# Altium PCB PC110.PcbDoc (part 17 of 24)
Units mm, origin at the board's own origin, x right, y up, seen from the top; angles counter-clockwise.
Board outline 150.05 x 107.35 mm, 10 copper layers (In2.Cu, F.Cu, B.Cu, In1.Cu, In3.Cu, In4.Cu, In5.Cu, In6.Cu, In7.Cu, In8.Cu); 936 components, 1434 nets, 4891 pads, 6088 vias.
Unrouted connection lines stored in the file: 2995.
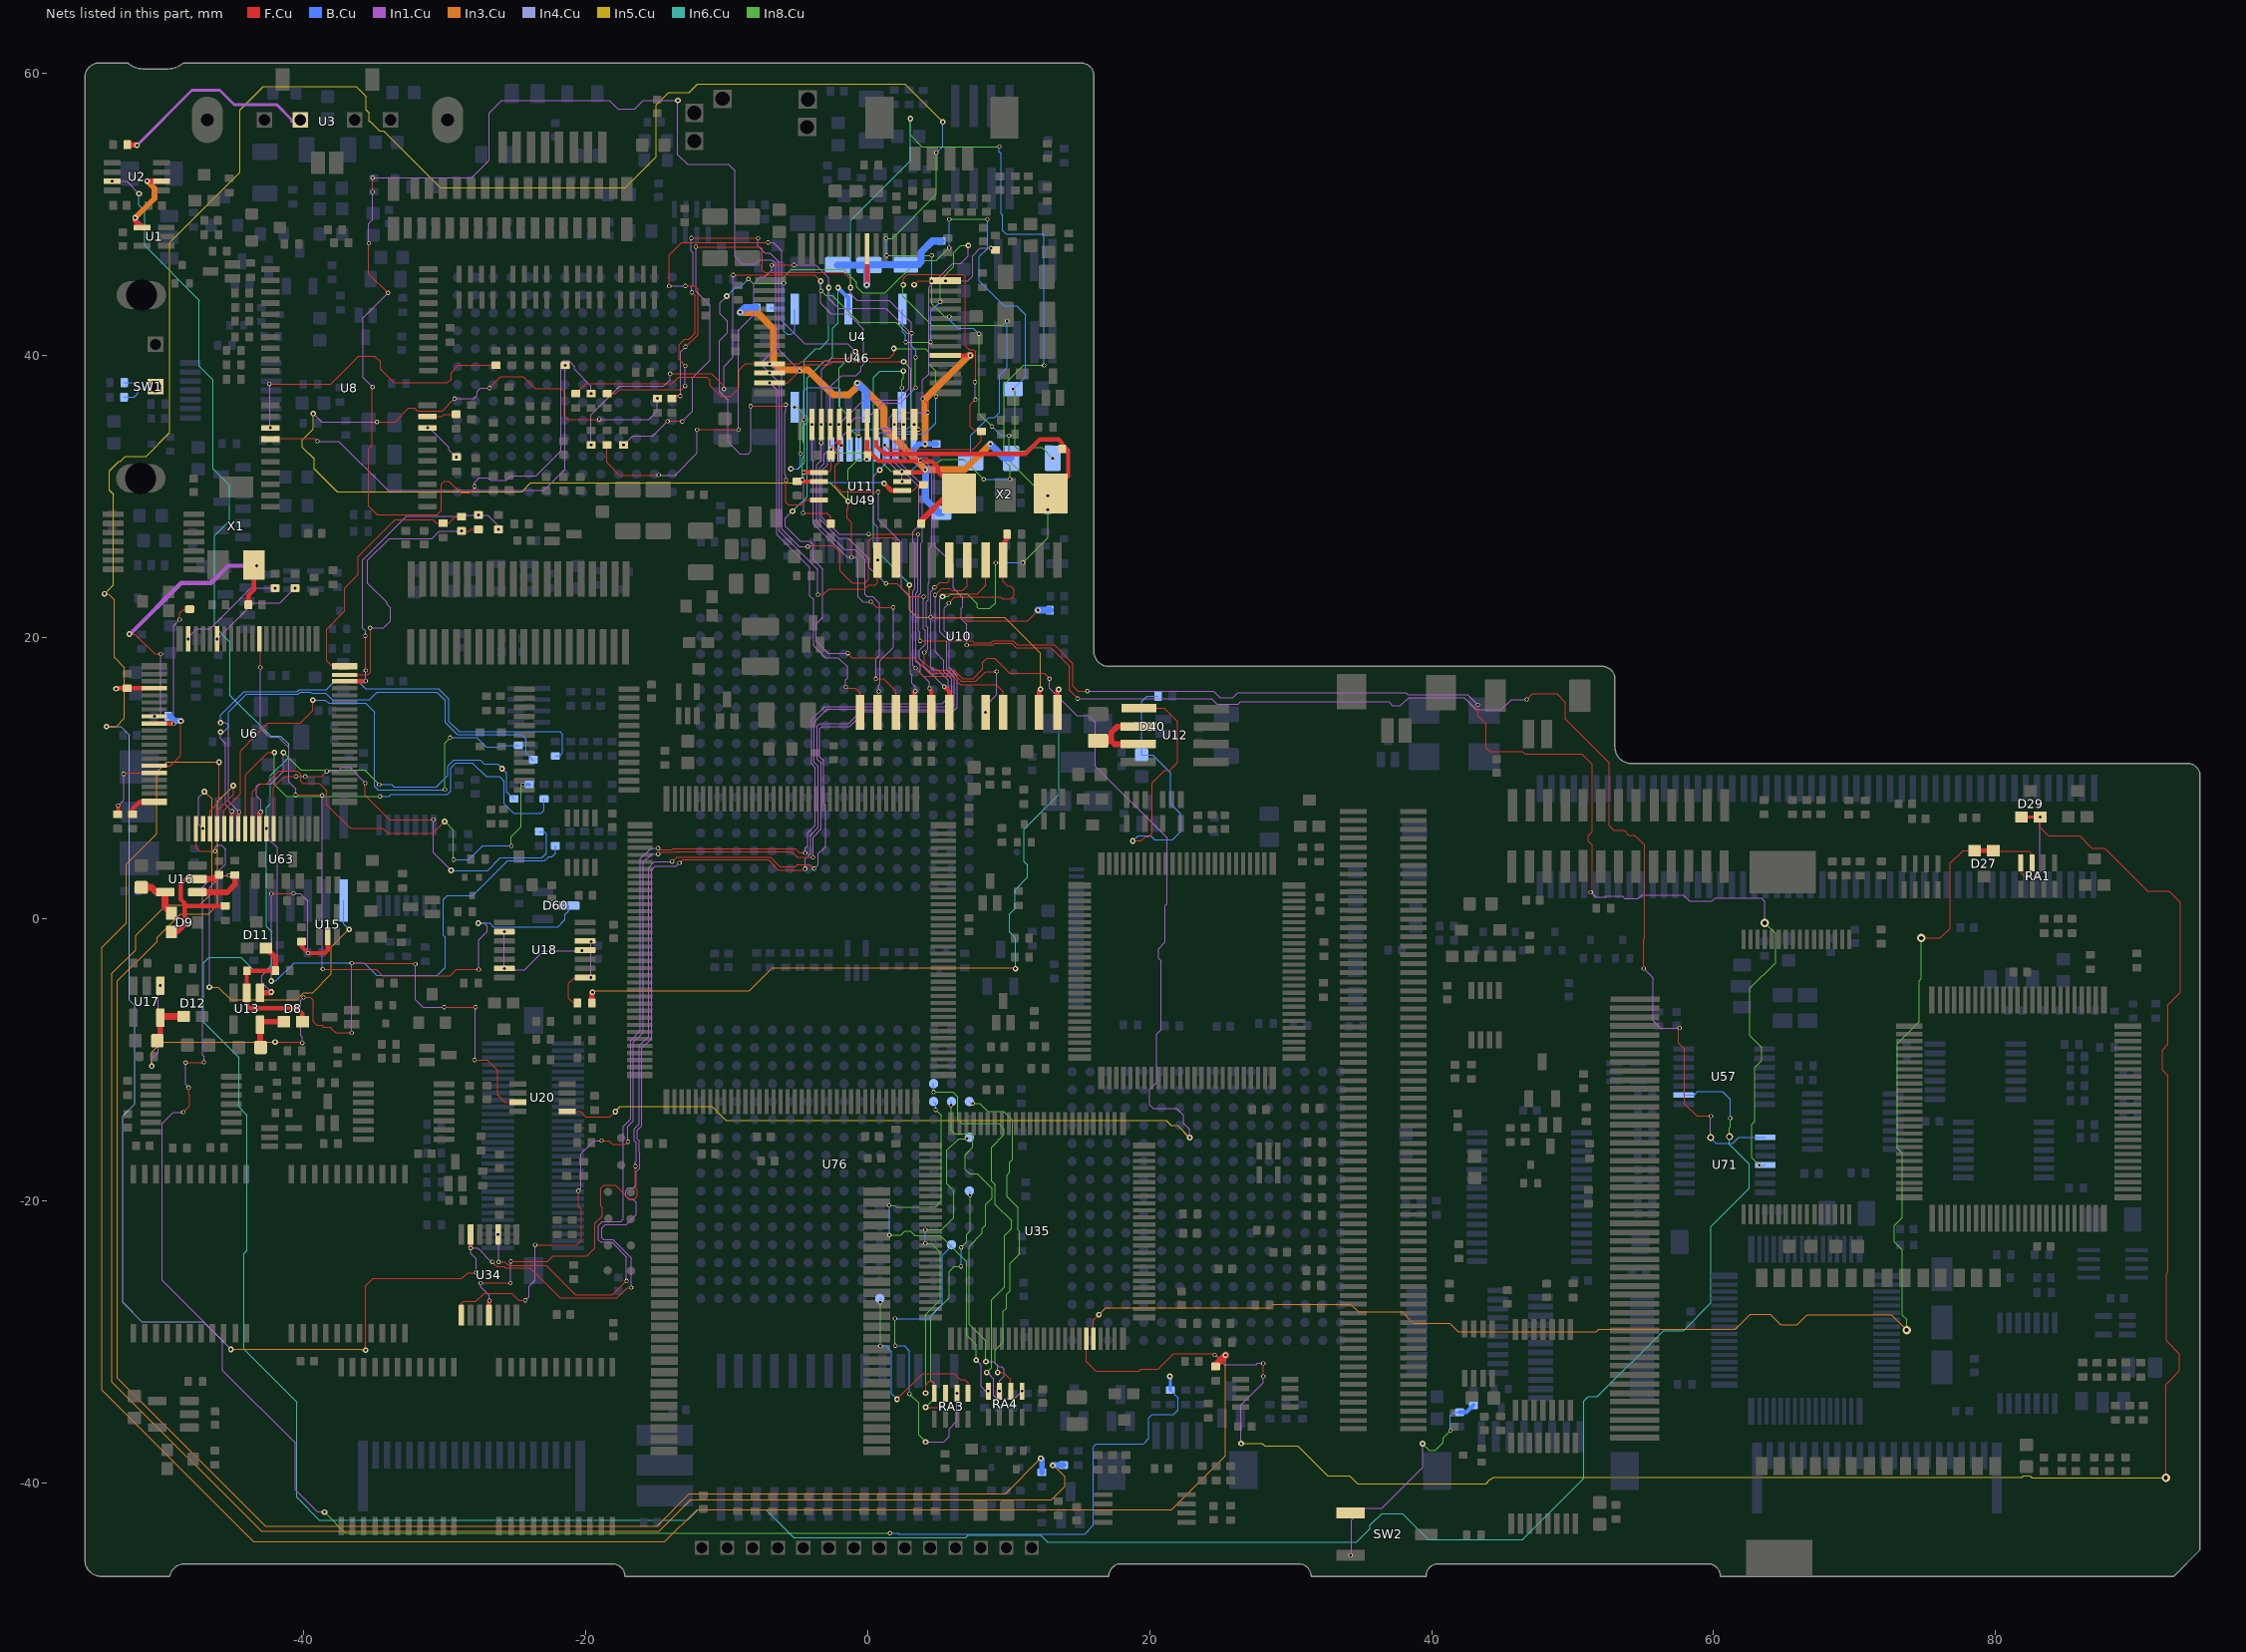
[diagram p24: the nets of this part, all layers, seen from the top]

## Via types
v1: diameter 0.3, hole 0.2, B.Cu to In8.Cu, tented both sides, 1934 vias
v2: diameter 0.4, hole 0.2, F.Cu to B.Cu, tented both sides, 1902 vias
v3: diameter 0.3, hole 0.2, F.Cu to In1.Cu, tented both sides, 1729 vias
v4: diameter 0.6, hole 0.3, F.Cu to B.Cu, tented both sides, 354 vias
v5: diameter 0.5, hole 0.3, F.Cu to B.Cu, tented both sides, 136 vias
v6: diameter 0.4, hole 0.2, B.Cu to In8.Cu, tented both sides, 12 vias
v7: diameter 0.3, hole 0.2, F.Cu to B.Cu, tented both sides, 6 vias
v8: diameter 0.6, hole 0.2, F.Cu to B.Cu, tented both sides, 4 vias
v9: diameter 0.5, hole 0.2, B.Cu to In8.Cu, tented both sides, 3 vias
v10: diameter 0.5, hole 0.2, F.Cu to B.Cu, tented both sides, 2 vias
v11: diameter 0.4, hole 0.3, F.Cu to B.Cu, tented both sides, 2 vias
v12: diameter 0.3, hole 0.2, F.Cu to In4.Cu, tented both sides, 2 vias
v13: diameter 0.6, hole 0.3, B.Cu to In8.Cu, tented both sides, 1 vias
v14: diameter 0.3, hole 0.2, F.Cu to In3.Cu, tented both sides, 1 vias

## Nets (pads, with @x,y where several pads share a name; then routed paths per layer and width w, separated by ;. In a path a pad name is that pad's centre, name@x,y a point inside that pad or via, vN(x,y) a via of type N, cw(c..) or ccw(c..) an arc to the next point about the centre after c; other vN are vias at no path point) (continued)
Net-(RA1-R3.1): D27.1 D27.3 RA1.3 U35.71 | length 104.9
  F.Cu w0.08: U35.71@16.01,-29.75 16.01,-28.44 v2(16.4,-28.05) ; v4(74.73,-1.34) 76.09,-1.34 76.79,-0.64 76.79,3.97 77.685,4.865 D27.1@78.515,4.865 ; D27.3@79.84,4.865 79.895,4.81 82.38,4.81 82.585,4.605 RA1.3@82.585,3.98
  F.Cu w0.3: D27.1@78.515,4.865 D27.3@79.84,4.865
  In3.Cu w0.08: v2(16.4,-28.05) 16.89,-27.56 28.51,-27.56 28.75,-27.32 34.26,-27.32 34.8,-27.86 37.89,-27.86 38.7,-28.67 41.28,-28.67 41.87,-29.26 51.67,-29.26 51.86,-29.07 61.55,-29.07 62.59,-28.03 64.02,-28.03 64.77,-28.78 65.91,-28.78 66.64,-28.05 72.6,-28.05 v4(73.69,-29.14)
  In8.Cu w0.08: v4(73.69,-29.14) 73.69,-28.37 73.4,-28.08 73.4,-23.47 72.81,-22.88 72.81,-21.74 73.39,-21.16 73.39,-16.59 73.04,-16.24 73.04,-8.82 74.58,-7.28 74.58,-4.38 74.74,-4.22 74.74,-1.35 v4(74.73,-1.34)
Net-(RA1-R4.1): D29.1 D29.3 RA1.4 U35.70 | length 151.5
  F.Cu w0.08: U35.70@15.51,-29.75 15.51,-31.38 16.17,-32.04 19.27,-32.04 19.41,-31.9 20.61,-31.9 21.71,-30.8 24.52,-30.8 v3(24.615,-30.895) ; v3(28.06,-32.43) v3(28.06,-31.5) ; RA1.4@81.785,3.98 81.785,3.295 82.02,3.06 v3(82.89,3.06) ; v3(83.155,7.245) 83.155,6.505 83.75,5.91 85.96,5.91 86.83,5.04 87.73,5.04 90.78,1.99 92.31,1.99 93.13,1.17 93.13,-5.17 92.24,-6.06 92.24,-8.87 91.84,-9.27 91.84,-10.7 92.24,-11.1 92.24,-25.03 92.12,-25.15 92.12,-29.9 93.06,-30.84 93.06,-32.03 92.08,-33.01 v4(92.08,-39.62)
  F.Cu w0.2: D29.3@81.83,7.245 v3(83.155,7.245)
  In1.Cu w0.08: v3(24.615,-30.895) 25.31,-31.59 27.55,-31.59 27.64,-31.5 v3(28.06,-31.5) ; v2(26.48,-37.19) 26.48,-34.45 28.06,-32.87 v3(28.06,-32.43) ; v3(82.89,3.06) 83.16,3.33 83.16,7.24 v3(83.155,7.245)
  In5.Cu w0.08: v2(26.48,-37.19) 27.97,-37.19 28.15,-37.37 30.49,-37.37 32.61,-39.49 34.19,-39.49 34.73,-40.03 43.85,-40.03 44.15,-39.73 44.22,-39.73 44.38,-39.57 81.9,-39.57 81.98,-39.49 82.41,-39.49 82.43,-39.51 82.47,-39.51 82.58,-39.62 v4(92.08,-39.62)
Net-(RA3-R1.1): RA3.1 U76.L16 | length 14.7
  F.Cu w0.08: v2(2.08,-34.05) 2.08,-34.04 3.9,-32.22 6.15,-32.22 6.57,-32.64 6.88,-32.64 7.125,-32.885 RA3.1@7.125,-33.62
  In8.Cu w0.08: v1(0.89,-27.17) 0.89,-30.24 v1(0.91,-30.26)
  B.Cu w0.08: U76.L16@0.86,-26.9 0.89,-26.93 v1(0.89,-27.17) ; v1(0.91,-30.26) 1.29,-30.26 1.69,-30.66 1.69,-33.66 v2(2.08,-34.05)
Net-(RA3-R2.1): RA3.2 U76.R13 | length 23.4
  In1.Cu w0.08: v2(4.11,-37.08) 5.38,-37.08 5.78,-36.68 5.78,-36.14 6.325,-35.595 v3(6.325,-33.62)
  In8.Cu w0.08: v1(1.93,-28.33) 1.93,-30.24 v1(1.94,-30.25) ; v1(2.96,-33.67) 3.62,-34.33 3.62,-36.59 v2(4.11,-37.08)
  B.Cu w0.08: v1(1.93,-28.33) 4.29,-28.33 5.3,-27.32 5.3,-23.86 5.94,-23.22 U76.R13@5.94,-23.09 ; v1(1.94,-30.25) 2.59,-30.25 2.96,-30.62 v1(2.96,-33.67)
Net-(RA3-R3.1): RA3.3 U76.T10 | length 19.4
  F.Cu w0.08: v2(4.1,-34.62) 5.23,-34.62 5.525,-34.325 RA3.3@5.525,-33.62
  In8.Cu w0.08: v2(4.1,-34.62) 4.7,-34.02 4.7,-32.94 4.49,-32.73 4.49,-28.13 5.78,-26.84 5.78,-24.97 6.13,-24.62 v1(6.62,-24.62) ; v1(6.63,-23.28) 7.01,-22.9 7.01,-22.35 7.26,-22.1 v1(7.26,-19.58)
  B.Cu w0.08: v1(6.62,-24.62) 6.62,-23.29 v1(6.63,-23.28) ; U76.T10@7.21,-19.28 7.26,-19.33 v1(7.26,-19.58)
Net-(RA3-R4.1): RA3.4 U76.T7 | length 24.1
  F.Cu w0.08: v2(4.11,-33.61) 4.11,-33.04 4.38,-32.77 4.59,-32.77 4.725,-32.905 RA3.4@4.725,-33.62
  In8.Cu w0.08: v1(4.09,-22.99) 4.52,-22.99 5.15,-23.62 5.15,-26.99 4.11,-28.03 v2(4.11,-33.61) ; v1(4.09,-22.02) 5.26,-22.02 6.12,-21.16 6.12,-19.28 5.6,-18.76 5.6,-16.4 6.44,-15.56 v1(7.05,-15.56)
  B.Cu w0.08: v1(4.09,-22.99) v1(4.09,-22.02) ; v1(7.05,-15.56) 7.12,-15.56 U76.T7@7.21,-15.47
Net-(RA4-R1.1): RA4.1 U76.P4 | length 30.8
  In1.Cu w0.08: v2(8.44,-32.15) 8.49,-32.15 8.94,-32.6 8.94,-33.79 9.16,-34.01 10.405,-34.01 v3(10.945,-33.47)
  In8.Cu w0.08: v1(4.67,-12.26) 6.03,-12.26 6.39,-12.62 6.39,-14.2 6.67,-14.48 9.28,-14.48 9.69,-14.89 9.69,-15.26 8.79,-16.16 8.79,-18.58 9,-18.79 ; v2(8.44,-32.15) 8.79,-31.8 8.79,-26.99 9.71,-26.07 9.71,-22.42 10.19,-21.94 10.19,-21.39 9.04,-20.24 9.04,-18.83 9,-18.79 ; 9.01,-18.8 9,-18.79
  B.Cu w0.08: v1(4.67,-12.26) U76.P4@4.67,-11.66
Net-(RA4-R2.1): RA4.2 U76.T5 | length 24.8
  F.Cu w0.08: v2(9.21,-32.15) 9.64,-32.15 10.145,-32.655 RA4.2@10.145,-33.47
  In8.Cu w0.08: v1(7.45,-13.07) 7.95,-13.07 8.52,-13.64 9.65,-13.64 10.29,-14.28 10.29,-17.01 10.08,-17.22 10.08,-17.94 9.87,-18.15 9.87,-19.68 10.66,-20.47 10.66,-22.06 10.77,-22.17 10.77,-23.74 10.09,-24.42 10.09,-26.37 9.85,-26.61 9.85,-27.58 9.61,-27.82 9.61,-30.01 9.05,-30.57 9.05,-31.47 9.21,-31.63 v2(9.21,-32.15)
  B.Cu w0.08: U76.T5@7.21,-12.93 7.35,-13.07 v1(7.45,-13.07)
Net-(RA4-R3.1): RA4.3 U76.R5 | length 25.5
  In1.Cu w0.08: v2(8.38,-31.38) 8.92,-31.38 9.29,-31.75 9.51,-31.75 9.68,-31.92 9.68,-32.39 9.345,-32.725 v3(9.345,-33.47)
  In8.Cu w0.08: v1(5.91,-13.18) 5.91,-14.96 6.18,-15.23 7.3,-15.23 7.45,-15.38 7.45,-16.18 6.93,-16.7 6.93,-17.75 7.22,-18.04 7.76,-18.04 8.83,-19.11 8.83,-19.8 8.37,-20.26 8.37,-21.7 8.13,-21.94 8.13,-22.27 7.2,-23.2 7.2,-28.72 8.38,-29.9 v2(8.38,-31.38)
  B.Cu w0.08: v1(5.91,-13.18) 5.91,-12.96 U76.R5@5.94,-12.93
Net-(RA4-R4.1): RA4.4 U76.P5 | length 29.7
  In1.Cu w0.08: v2(7.69,-31.27) 8.04,-31.62 8.04,-33.15 8.36,-33.47 v3(8.545,-33.47)
  In8.Cu w0.08: v1(1.53,-20.3) 1.91,-20.3 2.02,-20.41 4.78,-20.41 5.23,-19.96 5.23,-13.93 v1(4.82,-13.52) ; v1(1.54,-22.4) 2.36,-22.4 2.63,-22.13 2.65,-22.13 3.01,-22.13 3.33,-22.45 3.42,-22.45 5.16,-22.45 5.36,-22.65 7.01,-24.3 7.01,-29.49 7.69,-30.17 v2(7.69,-31.27)
  B.Cu w0.08: v1(1.53,-20.3) 1.54,-20.31 v1(1.54,-22.4) ; U76.P5@4.67,-12.93 4.82,-13.08 v1(4.82,-13.52)
Net-(SW1-B): R277.1 R280.1 SW1.2 | length 4
  B.Cu w0.08: R277.1@-52.75,37.03 -52.01,37.03 -51.77,37.27 -51.77,37.61 ; R280.1@-52.74,38.06 -52.02,38.06 -51.77,37.81 -51.77,37.61 ; SW1.2@-50.52,37.77 -51.31,37.77 -51.47,37.61 -51.77,37.61
Net-(SW2-B): R382.1 R383.2 SW2.2 | length 16.8
  In1.Cu w0.08: v3(34.25,-45.115) 34.3,-45.065 34.3,-42.63 35.14,-41.79 36.49,-41.79 39.39,-38.89 39.39,-37.24 v2(39.35,-37.2)
  In8.Cu w0.08: v2(39.35,-37.2) 39.82,-37.67 40.27,-37.67 40.83,-37.11 40.83,-36.78 v1(41.33,-36.28)
  B.Cu w0.08: v1(41.33,-36.28) 41.33,-35.21 41.57,-34.97 R383.2@41.99,-34.97
  B.Cu w0.3: R383.2@41.99,-34.97 42.47,-34.97 R382.1@42.96,-34.48
Net-(U1-Pad4): U1.4 U2.2 | length 5.3
  F.Cu w0.4: v2(-51.96,49.75) -51.96,49.56 U1.4@-51.46,49.06 ; v2(-51.11,52.35) -51.1,52.34 U2.2@-50.09,52.34
  In3.Cu w0.4: v2(-51.96,49.75) -50.59,51.12 -50.59,51.83 v2(-51.11,52.35)
Net-(U2-Pad7): U2.7 U57.9 | length 243.9
  In1.Cu w0.08: v3(-53.59,52.34) -52.57,52.34 v2(-51.69,51.46)
  In6.Cu w0.08: v2(-51.69,51.46) -51.69,50.65 -51.29,50.25 -51.29,47.78 -47.41,43.9 -47.41,39.23 -46.43,38.25 -46.43,31.93 -45.28,30.78 -45.28,28.27 -46.34,27.21 -46.34,20.76 -45.22,19.64 -45.22,15.86 -42.35,12.99 -41.65,12.99 -41.07,12.41 -41.07,11.48 -42.36,10.19 -42.36,8.19 -42.65,7.9 -42.65,-0.51 -42.25,-0.91 -42.25,-3.21 -42.59,-3.55 -43.61,-3.55 -44.45,-2.71 -46.72,-2.71 -47.11,-3.1 -47.11,-7.31 -44.59,-9.83 -44.59,-13.33 -44.02,-13.9 -44.02,-23.48 -44.26,-23.72 -44.26,-30.48 -40.51,-34.23 -40.51,-41.01 -38.89,-42.63 -12.77,-42.63 -12.03,-41.89 -7.22,-41.89 -5.24,-43.87 6.95,-43.87 7.12,-43.7 12.25,-43.7 12.74,-44.19 34.656,-44.19 35.626,-43.22 35.626,-42.974 36.06,-42.54 36.09,-42.54 36.48,-42.15 37.92,-42.15 39.765,-43.995 46.465,-43.995 46.485,-43.975 ; 46.46,-44 46.485,-43.975 ; v5(61.12,-15.43) 61.12,-15.96 62.525,-17.365 62.525,-19.085 59.8,-21.81 59.8,-27.225 57.85,-29.175 56.435,-29.175 51.76,-33.85 51.1,-33.85 50.79,-34.16 50.79,-39.67 46.485,-43.975
  In8.Cu w0.08: v5(61.12,-15.43) 61.12,-14.8 61.18,-14.74 v1(61.18,-14.1)
  B.Cu w0.08: U57.9@57.877,-12.47 58.63,-12.47 58.87,-12.23 60.62,-12.23 61.18,-12.79 v1(61.18,-14.1)
Net-(U3-IRDA_TXD): R8.2 U3.7 | length 14.3
  F.Cu w0.4: R8.2@-52.51,54.93 -51.88,54.93 v2(-51.84,54.89)
  In1.Cu w0.2: v2(-51.84,54.89) -47.94,58.79 -45.97,58.79 -44.94,57.76 -41.91,57.76 -40.87,56.72 -40.87,56.59
Net-(U4-CMR): C152.1 C155.2 C161.1 R226.1 U4.6 | length 12.5
  F.Cu w0.3: v2(-0.07,44.99) -0.05,45.01 U4.6@-0.05,47.54
  B.Cu w0.5: C152.1@-2.14,46.395 C161.1@0.1,46.395 ; v2(-0.07,44.99) -0.07,46.225 C161.1@0.1,46.395 ; C155.2@5.21,48.1 4.58,48.1 3.79,47.31 3.79,46.63 3.568,46.407 R226.1@2.71,46.408 0.112,46.407 C161.1@0.1,46.395
Net-(U4-IOR): U4.37 U71.11 | length 113.9
  F.Cu w0.08: v3(3.71,19.74) 7.4,19.74 7.52,19.62 8.77,19.62 8.91,19.76 10.31,19.76 10.61,19.46 13.23,19.46 14.56,18.13 14.56,16.52 14.91,16.17 v3(15.58,16.17) ; v3(43.28,15.2) 43.28,14.42 43.86,13.84 43.86,12.16 44.14,11.88 46.46,11.88 46.62,11.72 50.65,11.72 51.38,10.99 51.38,6.19 51.12,5.93 51.12,5.52 51.39,5.25 51.39,2.02 v3(51.28,1.91)
  In1.Cu w0.08: v3(1.9,35.09) 1.9,32.75 3.89,30.76 3.89,26.77 3.77,26.65 3.77,23.14 3.59,22.96 3.59,20.45 3.71,20.33 v3(3.71,19.74) ; v3(15.58,16.17) 24.52,16.17 24.98,15.71 25.91,15.71 26.27,16.07 38.16,16.07 38.3,15.93 42.55,15.93 v3(43.28,15.2) ; v3(51.28,1.91) 51.63,1.56 52.32,1.56 52.4,1.64 53.51,1.64 53.69,1.46 54.65,1.46 54.92,1.73 57.84,1.73 58.29,1.28 59.89,1.28 60.12,1.51 63.37,1.51 63.63,1.25 v4(63.63,-0.26)
  In8.Cu w0.08: v1(63.24,-17.45) 62.71,-16.92 62.71,-14.54 62.91,-14.34 62.91,-10.52 63.42,-10.01 63.42,-9.1 62.58,-8.26 62.58,-4.91 64.39,-3.1 64.39,-1.02 v4(63.63,-0.26)
  B.Cu w0.08: v1(63.24,-17.45) 63.642,-17.45 U71.11@63.663,-17.43
Net-(U4-IOW): U4.38 U71.8 | length 106.4
  F.Cu w0.08: v3(7.02,19.45) 8.88,19.45 8.99,19.56 10.22,19.56 10.52,19.26 12.99,19.26 14.3,17.95 14.3,16.24 v3(14.89,15.65) ; v3(46.75,15.59) 47.14,15.98 48.87,15.98 49.49,15.36 49.49,14.2 52.59,11.1 52.59,6.62 52.91,6.3 53.66,6.3 53.99,5.97 54.37,5.97 54.75,5.59 54.76,5.59 55.11,5.24 55.11,-1.37 55.03,-1.45 v3(55.03,-3.5) ; v3(57.58,-7.71) 57.51,-7.78 57.51,-8.78 57.94,-9.21 57.94,-13.09 58.81,-13.96 v3(59.81,-13.96)
  In1.Cu w0.08: v3(2.55,35.09) 2.55,33.36 3.16,32.75 4.17,32.75 4.73,32.19 4.73,26.5 6.05,25.18 6.05,23.48 6.73,22.8 6.73,22.14 6.65,22.06 6.65,21.29 7.02,20.92 v3(7.02,19.45) ; v3(14.89,15.65) 24.38,15.65 24.76,15.27 26.3,15.27 26.45,15.42 36.96,15.42 37.23,15.15 37.79,15.15 38.37,15.73 42.3,15.73 43.16,14.87 44.94,14.87 45.66,15.59 v3(46.75,15.59) ; v3(55.03,-3.5) 55.7,-4.17 55.7,-7.18 56.23,-7.71 v3(57.58,-7.71) ; v5(59.79,-15.49) 59.79,-13.98 v3(59.81,-13.96)
  B.Cu w0.08: v5(59.79,-15.49) 60.18,-15.88 61.37,-15.88 61.78,-15.47 63.652,-15.47 U71.8@63.663,-15.48
Net-(U4-REF): R23.1 U4.52 | length 7.7
  F.Cu w0.08: v2(3.29,45) 3.58,45.29 U4.52@5.5,45.29 ; v3(8.73,47.6) 8.93,47.6 R23.1@9.07,47.46
  In1.Cu w0.08: v3(5.51,45.27) 7.08,45.27 7.44,45.63 7.44,47.05 7.99,47.6 v3(8.73,47.6)
Net-(U4-RESET): U4.39 U20.5 | length 116
  F.Cu w0.08: U20.5@-21.32,-13.63 -20.38,-13.63 -19.99,-14.02 -18.28,-14.02 v2(-17.91,-13.65) ; v3(4.02,18.92) 4.02,18.2 4.57,17.65 6.15,17.65 6.73,17.07 7.47,17.07 8.17,17.77 8.17,18.21 8.46,18.5 9.01,18.5 10.08,17.43 12.52,17.43 v3(12.89,17.06)
  In1.Cu w0.08: v3(3.3,35.09) 3.3,35.21 3.01,35.5 2.46,35.5 2.24,35.28 2.24,33.07 2.85,32.46 4.06,32.46 4.53,31.99 4.53,26.48 4.38,26.33 4.38,23.9 4.29,23.81 4.29,22.66 4.16,22.53 4.16,20.77 4.26,20.67 4.26,19.16 v3(4.02,18.92) ; v3(12.89,17.06) 12.89,16.4 14.84,14.45 15.66,14.45 16.16,13.95 16.16,10.84 21.22,5.78 21.22,1.08 21.11,0.97 21.11,-1.62 20.62,-2.11 20.62,-2.79 20.8,-2.97 20.8,-7.82 20.48,-8.14 20.48,-11.58 20.14,-11.92 20,-12.06 20,-12.95 20,-13.16 20.14,-13.3 20.25,-13.41 21.61,-13.41 21.9,-13.41 22.21,-13.72 22.4,-13.91 22.4,-14.28 22.4,-14.48 22.68,-14.76 22.84,-14.92 v2(22.84,-15.49)
  In5.Cu w0.08: v2(-17.91,-13.65) -17.55,-13.29 -11.03,-13.29 -10.07,-14.25 21.15,-14.25 21.52,-14.62 21.97,-14.62 v2(22.84,-15.49)
Net-(U4-VCC_Bus): C213.1 U4.44 U49.24 | length 11.2
  F.Cu w0.3: U4.44@5.5,39.99 5.51,39.98 v2(7.27,39.98)
  In3.Cu w0.5: v2(4.08,33.71) 4.08,36.89 7.17,39.98 v2(7.27,39.98)
  B.Cu w0.4: U49.24@3.255,33.32 3.645,33.71 v2(4.08,33.71) C213.1@4.86,33.71
Net-(U4-Xin): C52.1 R70.2 U4.34 X2.1 | length 13.8
  F.Cu w0.3: U4.34@-0.05,35.09 -0.05,33.33 0.33,32.95 ; R70.2@-0.02,32.89 0.04,32.95 0.33,32.95 ; X2.1@6.47,30.19 6.47,30.27 4.97,31.77 4.97,32.06 4.54,32.49 0.79,32.49 0.33,32.95
  F.Cu w0.4: C52.1@3.8,28.06 3.8,28.27 5.72,30.19 X2.1@6.47,30.19
Net-(U4-Xout): C53.2 U4.35 X2.2 | length 19.9
  F.Cu w0.3: U4.35@0.6,35.09 0.6,33.57 1.17,33 11.18,33 12.21,34.03 13.54,34.03 13.8,33.77 C53.2@13.8,33.35 14.11,33.35 14.21,33.25 14.21,31.43 X2.2@12.97,30.19
Net-(U6-P02): R336.1 U6.52 | length 27.3
  F.Cu w0.3: U6.52@-43.15,6.43 -43.15,7.51 v3(-43.05,7.61)
  In1.Cu w0.08: v3(-43.05,7.61) -43.05,8.43 -43.37,8.75 -43.37,9.41 -43.19,9.59 -42.34,9.59 -41.44,10.49 v2(-41.44,11.82)
  In8.Cu w0.08: v2(-41.44,11.82) -40.21,10.59 -35.7,10.59 v1(-34.66,9.55)
  B.Cu w0.08: v1(-34.66,9.55) -33.77,9.55 -33.61,9.39 -30.59,9.39 -29.77,10.21 -29.77,10.86 -29.35,11.28 -27.47,11.28 -27.19,11 -26.26,11 v2(-25.94,10.68) -25.61,10.35 -25.61,9.05 R336.1@-25.09,8.53
Net-(U6-P03): R339.2 U6.51 | length 32.5
  F.Cu w0.08: U6.51@-43.65,6.43 -43.65,9.05 -43.09,9.61 -42.67,9.61 -41.76,10.52 -40.46,10.52 -40.21,10.27 -40.21,9.78 -40.08,9.65 -38.92,9.65 -38.36,9.09 -38.36,8.13 -36.69,6.46 -34.41,6.46 -34.04,6.09 -30.85,6.09 v2(-30.01,6.93)
  In8.Cu w0.08: v2(-30.01,6.93) -29.38,6.3 v1(-29.38,4.22) ; v1(-25.28,5.2) -25.28,5.85 -24.57,6.56 -24.57,9.45 v1(-24.47,9.55)
  B.Cu w0.08: v1(-29.38,4.22) -28.3,4.22 -27.32,5.2 v1(-25.28,5.2)
  B.Cu w0.2: v1(-24.47,9.55) R339.2@-23.99,9.55
Net-(U6-P04): R328.1 U6.50 | length 33.5
  F.Cu w0.08: U6.50@-44.15,6.43 -44.15,10.23 -42.56,11.82 v2(-42.09,11.82)
  In8.Cu w0.08: v2(-42.09,11.82) -42.09,9.56 -41.25,8.72 v1(-34.6,8.72)
  B.Cu w0.08: v1(-34.6,8.72) -33.95,8.72 -33.81,8.86 -29.82,8.86 -29.58,9.1 -29.58,10.74 -29.22,11.1 -28.05,11.1 -27.07,10.12 -26.12,10.12 -25.79,9.79 -25.79,8.19 -25.11,7.51 -23.18,7.51 -22.96,7.73 R328.1@-22.96,8.53
Net-(U6-P05): R354.1 U6.49 | length 38.5
  F.Cu w0.2: U6.49@-44.65,6.43 -44.65,7.53 v3(-44.58,7.6)
  In1.Cu w0.08: v2(-45.91,13.94) -45.56,13.94 -45.34,13.72 -45.34,8.36 v3(-44.58,7.6)
  B.Cu w0.08: v2(-45.91,13.94) -45.91,14.47 -44.23,16.15 -40.45,16.15 -40.31,16.29 -38.4,16.29 -37.82,16.87 -36.14,16.87 -35.63,16.36 -30.45,16.36 -29.7,15.61 -29.7,14.025 -28.975,13.3 -21.84,13.3 -21.65,13.11 -21.65,11.775 -21.845,11.58 R354.1@-22.16,11.58
Net-(U6-P06): R355.1 U6.48 | length 35.1
  F.Cu w0.2: U6.48@-45.15,6.43 -45.15,7.6 v3(-45.1,7.65)
  In1.Cu w0.08: v2(-45.91,13.28) -45.91,12.81 -45.56,12.46 -45.56,8.11 v3(-45.1,7.65)
  B.Cu w0.08: v2(-45.91,13.28) -45.68,13.28 -45.34,13.62 -45.34,14.69 -44.06,15.97 -40.39,15.97 -40.24,16.12 -39.55,16.12 -39.45,16.02 -38.43,16.02 -37.98,15.57 -35.35,15.57 -34.82,16.1 -30.56,16.1 -29.975,15.515 -29.975,13.95 -29.125,13.1 -24.56,13.1 -24.25,12.79 -24.25,11.79 -23.77,11.31 R355.1@-23.72,11.31
Net-(U6-P10): R413.2 U6.46 | length 122.9
  F.Cu w0.08: U6.46@-46.15,6.43 -46.15,7.7 -45,8.85 v2(-45,9.47)
  In3.Cu w0.08: v2(-45,9.47) -46.11,8.36 -46.11,1.03 -46.76,0.38 -48.73,0.38 -50.41,-1.3 -50.41,-1.57 -53.21,-4.37 -53.21,-32.54 -42.72,-43.03 -14.95,-43.03 -12.66,-40.74 9.77,-40.74 v2(12.27,-38.24)
  B.Cu w0.4: v2(12.27,-38.24) 12.35,-38.32 R413.2@12.35,-39.23
Net-(U6-P11): R167.2 U6.45 | length 150
  F.Cu w0.08: U6.45@-46.65,6.43 -46.65,7.68 -46.01,8.32 v2(-46.01,11.14)
  F.Cu w0.5: R167.2@24.67,-31.72 24.67,-31.63 v2(25.38,-30.92)
  In3.Cu w0.08: v2(-46.01,11.14) -49.72,11.14 -50.44,10.42 -50.44,6.06 -52.58,3.92 -52.58,-0.25 -54.32,-1.99 -54.32,-33.4 -43.56,-44.16 -14.39,-44.16 -12.12,-41.89 21.54,-41.89 25.38,-38.05 v2(25.38,-30.92)
Net-(U6-P12): R407.1 U6.44 | length 125.3
  In1.Cu w0.08: v3(-47.15,6.43) -47.455,6.735 -47.455,8.645 v2(-47.05,9.05)
  In3.Cu w0.08: v2(-47.05,9.05) -46.52,8.52 -46.52,7.92 -46.52,1.87 -47.39,1 -49.77,1 -51.92,-1.15 -51.92,-2.17 -53.6,-3.85 -53.6,-32.83 -43.02,-43.41 -14.8,-43.41 -12.56,-41.17 13.05,-41.17 13.99,-40.23 13.99,-39.56 13.17,-38.74 v2(13.12,-38.74)
  B.Cu w0.08: v2(13.12,-38.74) v2@13.14,-38.72
  B.Cu w0.4: v2@13.14,-38.72 R407.1@13.88,-38.72
Net-(U6-P13): R390.2 U6.43 | length 131
  F.Cu w0.08: v3(-48.55,-13.69) -48.09,-13.23 -48.09,-12.49 -48.17,-12.41 v3(-48.17,-11.94) ; v3(-48.38,-10.16) -47.1,-10.16 v3(-47.09,-10.15) ; U6.43@-47.65,6.43 -47.65,5.09 -47.39,4.83 v3(-46.29,4.83)
  In1.Cu w0.08: v3(-48.55,-13.69) -49.26,-13.69 -50.04,-14.47 -50.04,-25.62 -45.78,-29.88 -45.78,-32 -40.62,-37.16 -40.62,-40.45 -39.05,-42.02 -38.57,-42.02 v2(-38.54,-42.05) ; v3(-48.38,-10.16) -48.38,-11.73 v3(-48.17,-11.94) ; v3(-47.09,-10.15) -47.09,-9.75 -47.19,-9.65 -47.19,2.29 -45.56,3.92 -45.56,4.97 -45.84,5.25 -46.15,5.25 -46.29,5.11 v3(-46.29,4.83)
  In8.Cu w0.08: v2(-38.54,-42.05) -38.53,-42.05 -37.05,-43.53 1.57,-43.53 v1(1.58,-43.54)
  B.Cu w0.08: v1(1.58,-43.54) 2.16,-43.54 2.23,-43.61 15.39,-43.61 16.01,-42.99 16.01,-37.39 16.2,-37.2 19.57,-37.2 19.93,-36.84 19.93,-35.36 20.17,-35.12 21.71,-35.12 22.02,-34.81 22.02,-33.95 R390.2@21.47,-33.4 ; v2(21.43,-32.42) v2@21.47,-32.46
  B.Cu w0.2: R390.2@21.47,-33.4 v2@21.47,-32.46
Net-(U6-P16): R86.2 U6.40 | length 2.2
  F.Cu w0.3: R86.2@-52.13,7.41 -52.14,7.42 -52.14,7.83 -51.64,8.33 U6.40@-50.6,8.33
Net-(U6-P22): R89.2 U6.36 | length 5.3
  F.Cu w0.08: v3(-52.78,10.31) -52.71,10.38 U6.36@-50.6,10.38
  F.Cu w0.3: R89.2@-53.22,7.45 -53.17,7.5 v3(-53.17,8.06)
  In1.Cu w0.08: v3(-53.17,8.06) -52.78,8.45 v3(-52.78,10.31)
Net-(U6-P23): R283.1 U6.35 | length 5.7
  F.Cu w0.08: U6.35@-50.6,10.88 -49.46,10.88 -48.72,11.62 -48.72,14.046 v2(-48.714,14.052)
  B.Cu w0.08: v2@-48.733,14.07 v2(-48.714,14.052)
  B.Cu w0.4: R283.1@-49.61,14.4 -49.48,14.4 -49.15,14.07 v2@-48.733,14.07
Net-(U6-P40): R42.2 U6.24 | length 2.7
  F.Cu w0.3: v2(-53.31,16.34) -53.27,16.38 R42.2@-52.52,16.38 U6.24@-50.6,16.38
Net-(U6-P45): R38.1 U6.19 | length 7.7
  In1.Cu w0.08: v3(-48.2,19.88) -48.2,20.01 -47.61,20.6 -46.64,20.6 -43.76,23.48 v3(-42.04,23.48)
Net-(U6-P51): R39.1 U6.15 | length 7
  In1.Cu w0.08: v3(-46.15,19.86) -43.59,22.42 -41.69,22.42 v3(-40.63,23.48)
Net-(U6-P57): D60.3 U6.9 | length 49.8
  F.Cu w0.08: U6.9@-43.15,19.88 -43.08,19.81 v3(-43.08,17.86) ; v3(-40.58,8.82) -38.73,8.82 v3(-38.69,8.78) ; v3(-38.65,-3.54) -34.88,-3.54 -34.41,-4.01 -29.62,-4.01 -29.18,-3.57 v3(-27.59,-3.57)
  In1.Cu w0.08: v3(-43.08,17.86) -43.08,13.56 -42.44,12.92 -41.79,12.92 -41.06,12.19 -41.06,9.74 -40.58,9.26 v3(-40.58,8.82) ; v3(-38.69,8.78) -38.69,-3.5 v3(-38.65,-3.54) ; v2(-27.63,-0.28) -27.21,-0.28 -26.98,-0.51 -26.98,-0.85 -27.59,-1.46 v3(-27.59,-3.57)
  B.Cu w0.08: v2(-27.63,-0.28) -26.81,-0.28 -26.55,-0.54 -21.98,-0.54 -21.46,-0.02 -21.46,0.35 -21.183,0.627 D60.3@-21.183,0.96
Net-(U6-SEG00): R331.2 U6.54 | length 30.3
  F.Cu w0.08: U6.54@-42.15,6.43 -42.15,9.35 -41.37,10.13 v3(-40.55,10.13) ; v3(-39.89,10.12) -38.74,10.12 v3(-38.37,10.49) ; v3(-35.64,9.66) -35.64,8.8 -33.91,7.07 v3(-30.81,7.07)
  In1.Cu w0.08: v3(-40.55,10.13) -39.9,10.13 v3(-39.89,10.12) ; v3(-38.37,10.49) -37.59,10.49 -37.33,10.75 -36.73,10.75 v3(-35.64,9.66) ; v3(-30.81,7.07) -30.81,4.72 v2(-29.55,3.46)
  B.Cu w0.08: v2(-29.55,3.46) -26.96,3.46 -26.06,4.36 -23.11,4.36 -22.78,4.69 -22.78,6.06 -22.94,6.22 R331.2@-23.31,6.22
Net-(U6-SEG01): R351.1 U6.53 | length 39.5
  In1.Cu w0.08: v3(-42.65,6.43) -42.65,5.83 -41.88,5.06 -41.88,-3.31 -42.31,-3.74 v2(-42.31,-4.38)
  B.Cu w0.08: v2(-42.31,-4.38) -41.98,-4.38 -40.69,-3.09 -35.73,-3.09 -34.85,-3.97 -30.52,-3.97 -29.97,-3.42 -29.97,-1.28 -30.11,-1.14 -30.11,1.38 -29.81,1.68 -28.01,1.68 -25.54,4.15 -22.91,4.15 -22.62,4.44 -22.38,4.44 -22.15,4.67 R351.1@-22.15,5.2
Net-(U6-SEG07): R330.2 U6.47 | length 37.2
  F.Cu w0.08: U6.47@-45.65,6.43 -45.65,7.73 -44.5,8.88 -44.5,11.92 -43.89,12.53 -43.89,12.57 -42.55,13.91 -40.24,13.91 -39.36,14.79 v2(-39.36,15.54)
  In8.Cu w0.08: v1(-30,9.19) -30,12.5 v1(-29.62,12.88)
  B.Cu w0.08: v2(-39.36,15.54) -38.47,15.54 -38.24,15.31 -35.61,15.31 -34.99,14.69 -34.99,9.43 -34.75,9.19 v1(-30,9.19) ; v1(-29.62,12.88) -27.72,12.88 -27.05,12.21 -26.17,12.21 -26.05,12.33 R330.2@-24.77,12.33
Net-(U6-VL1): R43.2 R63.2 U6.80 | length 18.4
  F.Cu w0.08: U6.80@-37.1,17.93 -37.97,17.93 -38.38,18.34 -38.38,20.57 -37.1,21.85 -37.1,23.49 -36.15,24.44 -36.15,25.71 -33.54,28.32 -30.84,28.32 -30.61,28.09 R63.2@-30.12,28.09 -29.71,28.09 -29.24,28.56 R43.2@-28.82,28.56
Net-(U6-VL2): R43.1 R62.1 U6.79 | length 20.4
  F.Cu w0.08: U6.79@-37.1,17.33 -35.48,17.33 -35.28,17.53 -35.28,20.65 v3(-35.3,20.67) ; v3(-28.82,27.54) -28.25,27.54 -28.14,27.65 R62.1@-27.61,27.65
  In1.Cu w0.08: v3(-35.3,20.67) -34.34,20.67 -33.85,21.16 -33.85,22.08 -34.1,22.33 -34.1,22.46 -35.46,23.82 -35.46,25.46 -33.91,27.01 -30.92,27.01 -30.39,27.54 v3(-28.82,27.54)
Net-(U6-VL3): R52.1 R62.2 U6.78 | length 21.7
  F.Cu w0.08: v3(-35.63,20.1) -35.61,20.08 v3(-35.61,17.64)
  F.Cu w0.3: U6.78@-37.1,16.88 -35.64,16.88 v3(-35.62,16.9)
  In1.Cu w0.08: v3(-35.63,20.1) -35.63,20.44 -35.82,20.63 -35.82,25.48 -32.73,28.57 -28.72,28.57 -28.62,28.67 v3(-27.61,28.67) -26.97,28.67 -26.2,27.9 v3(-26.2,27.65) ; v3(-35.62,16.9) -35.61,16.91 v3(-35.61,17.64)
Net-(U6-Xin): C28.1 U6.28 X1.1 | length 21.9
  F.Cu w0.08: v2(-52.38,20.22) -52,20.22 -50.59,18.81 v3(-50.15,18.81)
  F.Cu w0.3: C28.1@-43.93,22.3 -43.93,22.97 -43.53,23.37 X1.1@-43.53,25.11 -43.48,25.06 v3(-43.34,25.06)
  In1.Cu w0.08: -52.39,20.26 -52.39,20.23 v2(-52.38,20.22) ; v3(-50.6,14.38) -50.29,14.38 -50.15,14.52 v3(-50.15,18.81)
  In1.Cu w0.3: -52.39,20.26 -52.29,20.26 -48.7,23.85 -46.58,23.85 -45.37,25.06 v3(-43.34,25.06)
Net-(U6-Xout): R40.1 U6.29 | length 10.2
  F.Cu w0.08: v3(-48.81,21.25) -48.81,21.71 -48.53,21.99 R40.1@-48.1,21.99
  F.Cu w0.3: U6.29@-50.6,13.88 -49.25,13.88 v3(-49.23,13.86)
  In1.Cu w0.08: v3(-49.23,13.86) -49.24,13.87 -49.24,20.82 v3(-48.81,21.25)
Net-(U8-LCAS#): R58.2 U8.29 | length 2.1
  F.Cu w0.08: U8.29@-31.22,35.65 -30.23,35.65 -30.07,35.81 R58.2@-29.19,35.81 ; R58.2@-29.03,35.81 R58.2@-29.02,35.8
Net-(U8-RAS#): R21.1 U8.14 | length 30.5
  F.Cu w0.08: U8.14@-42.37,34.05 -42.32,34.1 -39.23,34.1 v3(-39.03,33.9)
  In1.Cu w0.08: v3(-39.03,33.9) -37.52,33.9 -34.03,30.41 -22.97,30.41 -21.48,31.9 -21.48,39.27 v3(-21.46,39.29)
Net-(U8-UCAS#): R51.2 U8.28 | length 3
  In1.Cu w0.08: v3(-31.22,34.85) -31.08,34.85 -29.7,33.47 -29.7,33.3 v3(-29.18,32.78)
Net-(U8-WE#): R16.1 U8.13 | length 21.9
  F.Cu w0.08: v3(-42.44,37.96) -38.1,37.96 -36.12,39.94 -34.97,39.94 -34.56,39.53 -34.56,39.01 -33.6,38.05 -29.82,38.05 -29.55,38.32 -29.55,38.78 -29.04,39.29 R16.1@-26.37,39.29
  In1.Cu w0.08: v3(-42.44,37.96) -42.42,37.94 -42.42,34.9 v3(-42.37,34.85)
Net-(U10-AO): R77.1 U10.4 U34.11 | length 95.2
  F.Cu w0.08: v3(-27.45,-25.81) v3(-25.34,-25.81) ; v3(-25.32,-24.27) -22.7,-24.27 -22.33,-23.9 -19.91,-23.9 -19.34,-23.33 -19.34,-21.56 -18.82,-21.04 -18.82,-20.47 -18.94,-20.35 -18.94,-19.08 -18.71,-18.85 -17.92,-18.85 -16.93,-19.84 -16.55,-19.84 -16.36,-19.65 -16.36,-19.18 -16.48,-19.06 v3(-16.48,-17.52) ; v3(-13.87,4.09) -13.56,4.4 -6.91,4.4 -6.28,3.77 -6.26,3.77 -6.22,3.73 -5.14,3.73 -4.99,3.88 -4.08,3.88 v3(-3.79,3.59) ; v3(5.75,22.41) 6.19,22.85 9.42,22.85 9.55,22.72 10.14,22.72 10.37,22.95 10.37,23.39 10.12,23.64 9.93,23.64 9.6,23.97 U10.4@9.6,25.47
  F.Cu w0.3: U34.11@-26.87,-28.085 -26.87,-27.08 v3(-26.84,-27.05) ; U10.4@9.6,25.47 9.6,26.66 9.88,26.94 R77.1@9.88,27.31
  In1.Cu w0.08: v3(-27.45,-25.81) -27.45,-26.08 -26.84,-26.69 v3(-26.84,-27.05) ; v3(-25.34,-25.81) -25.34,-24.29 v3(-25.32,-24.27) ; v3(-16.48,-17.52) -16.48,-17.21 -16.42,-17.15 -16.42,-15.85 -16.56,-15.71 -16.56,-14.86 -16.21,-14.51 -16.21,-8.98 -15.55,-8.32 -15.55,3.67 -15.13,4.09 v3(-13.87,4.09) ; v3(-3.79,3.59) -3.78,3.59 -3.5,3.87 -3.5,4.65 -2.99,5.16 -2.99,8.08 -3.14,8.23 -3.14,11.26 -3.4,11.52 -3.4,13.51 -3.23,13.68 -1.28,13.68 -0.25,14.71 6.03,14.71 6.34,15.02 6.34,17.27 5.77,17.84 5.77,20.09 5.42,20.44 5.42,22.08 v3(5.75,22.41)
Net-(U10-CS#): R244.2 U10.7 U34.3 | length 98.3
  F.Cu w0.08: v3(-26.18,-24.31) -25.74,-24.31 -25.48,-24.57 -22.82,-24.57 -20.74,-26.65 -18.1,-26.65 v3(-17.11,-25.66) ; v3(-14.87,5.04) -14.76,4.93 -13.89,4.93 -13.83,4.99 -5.15,4.99 -4.87,4.71 v3(-4.43,4.71) ; v3(4.46,21.43) 4.67,21.43 4.72,21.38 6.76,21.38 6.97,21.17 11.34,21.17 v2(12.08,21.91) ; v3(4.73,23.53) 4.76,23.53 5.1,23.87 5.67,23.87 5.8,24 U10.7@5.8,25.47
  In1.Cu w0.08: v3(-26.22,-22.36) -26.18,-22.4 v3(-26.18,-24.31) ; v3(-17.11,-25.66) -17.11,-23.96 -18.16,-22.91 -18.93,-22.91 -19.1,-22.74 -19.1,-21.72 -18.84,-21.46 -17.53,-21.46 -17.35,-21.28 -17.35,-14.68 -16.82,-14.15 -16.82,-8.61 -16.13,-7.92 -16.13,4.28 -15.37,5.04 v3(-14.87,5.04) ; v3(-4.43,4.71) -4.43,5.05 -4.25,5.23 -4.25,6.14 -3.72,6.67 -3.72,10.74 -3.98,11 -3.98,14.18 -3.07,15.09 -0.82,15.09 -0.63,15.28 5.28,15.28 5.71,15.71 5.71,16.94 4.97,17.68 4.7,17.68 4.46,17.92 v3(4.46,21.43) 4.46,23.26 v3(4.73,23.53)
  B.Cu w0.5: v2(12.08,21.91) R244.2@12.93,21.91
Net-(U10-D0): R64.2 U4.23 U10.10 U49.22 | length 65.3
  F.Cu w0.08: R64.2@-20.71,37.28 -19.99,38 -13.88,38 -13.42,38.46 -11.42,38.46 -11.18,38.22 -11.18,37.84 -10.46,37.12 -9.69,37.12 -9.13,37.68 -9.13,37.98 -9.12,37.99 -9.12,38.96 -8.69,39.39 v3(-6.95,39.39) -4.85,39.39 -4.65,39.59 -2.74,39.59 -2.54,39.79 1.53,39.79 1.86,40.12 1.86,40.47 v2(1.85,40.48) ; v3(-4.26,26.43) -4.19,26.5 -2.46,26.5 -1.97,26.01 -1.97,24.69 -1.12,23.84 -0.19,23.84 0.06,24.09 0.06,26.8 0.32,27.06 1.88,27.06 2,26.94 U10.10@2,25.47
  In1.Cu w0.08: v3(-6.95,39.39) -6.1,38.54 -6.1,27.67 -4.86,26.43 v3(-4.26,26.43)
  In8.Cu w0.08: v2(1.85,40.48) 4.08,40.48 4.33,40.23 4.33,39.37 4.84,38.86 v1(4.84,37.07)
  B.Cu w0.08: U49.22@1.955,33.32 1.955,34.305 2.07,34.42 4.05,34.42 4.84,35.21 v1(4.84,37.07)
Net-(U10-D1): R54.2 U4.24 U10.11 U49.21 | length 137
  F.Cu w0.08: v3(-35.39,47.94) -35.39,45.78 v3(-34.03,44.42) ; v3(-35.12,37.74) -35.16,37.7 -35.16,33.62 -35.41,33.37 -35.41,29.3 -34.8,28.69 -30.56,28.69 -30.24,29.01 -30.24,30.84 -30.03,31.05 -29.7,31.05 -28.88,30.23 -28.23,30.23 -27.9,30.56 v3(-27.9,30.71) ; v3(-35.12,51.59) v3(-35.12,52.59) ; v3(-3.54,23.02) -3.16,23.02 -2.75,23.43 -0.23,23.43 0.05,23.71 0.54,23.71 0.7,23.87 v3(0.7,25.47)
  In1.Cu w0.08: v3(-35.39,47.94) -35.39,49.35 -35.12,49.62 v3(-35.12,51.59) ; v3(-35.12,37.74) -35.8,38.42 -35.8,42.65 v3(-34.03,44.42) ; v3(-35.12,52.59) -28.08,52.59 -26.85,53.82 -26.85,57.19 -25.96,58.08 -18.32,58.08 -17.72,57.48 -16.54,57.48 -15.94,58.08 -13.48,58.08 v2(-13.47,58.07) -13.47,54.23 -12.77,53.53 -9.87,53.53 -9.43,53.09 -9.43,47 -8.91,46.48 -8.02,46.48 -7.73,46.77 -6.75,46.77 -6.53,46.55 -6.53,40.48 -7.44,39.57 -7.44,39.23 v3(-6.95,38.74) -6.27,38.06 -6.27,27.52 -3.54,24.79 v3(-3.54,23.02) ; v3(-27.9,30.71) -27.9,30.97 -27.56,31.31 -26.95,31.31 -26.76,31.12 -25.65,31.12 -25.32,31.45 -23.54,31.45 -21.77,33.22 -21.77,39.4 -21.57,39.6 -21.21,39.6 -20.805,39.195 -20.805,39.005 -19.62,37.82 v3(-19.62,37.28) ; v3(0.7,25.47) 0.7,27.8 0.41,28.09 0.41,31.42 v2(0.85,31.86)
  B.Cu w0.08: v2(0.85,31.86) 1.305,32.315 U49.21@1.305,33.32
Net-(U10-D2): R47.2 U4.25 U10.13 U49.20 | length 79.4
  F.Cu w0.08: R47.2@-18.48,37.28 -17.9,37.28 -17.6,37.58 -13.19,37.58 v3(-12.95,37.82) ; v3(-12.94,39.25) -12.94,39.27 -13.39,39.72 -13.39,40.75 -12.99,41.15 -12.67,41.15 -12.25,41.57 -12.25,44.23 v3(-12.48,44.46) ; v3(-12.52,48.31) -12.51,48.3 v3(-7.78,48.3) ; v3(-6.95,38.04) -5.69,38.04 v3(-4.83,38.9) -4.41,39.32 -2.685,39.32 -2.465,39.54 v2(2.55,39.54) ; v3(-1.56,16.48) -1.48,16.4 -0.89,16.4 -0.55,16.06 U10.13@-0.55,14.67
  In1.Cu w0.08: v3(-12.95,37.82) -12.95,39.24 v3(-12.94,39.25) ; v3(-12.52,48.31) -12.52,47.41 -12.38,47.27 -12.38,44.95 -12.48,44.85 v3(-12.48,44.46) ; v3(-7.78,48.3) -7.78,47.74 -7.3,47.26 -6.95,47.26 -6.32,46.63 -6.32,40.39 v3(-4.83,38.9) ; v3(-6.95,38.04) -6.46,37.55 -6.46,27.29 -4.11,24.94 -4.11,22.94 -3.85,22.68 -3.85,19.39 -3.02,18.56 -2.09,18.56 -1.42,17.89 -1.42,17.11 -1.56,16.97 v3(-1.56,16.48)
  In8.Cu w0.08: v2(2.55,39.54) 3.06,39.03 3.06,35.29 v1(3.61,34.74)
  B.Cu w0.08: U49.20@0.655,33.32 0.655,34.305 0.89,34.54 1.66,34.54 1.71,34.59 3.23,34.59 3.38,34.74 v1(3.61,34.74)
Net-(U10-D3): R50.2 U4.28 U10.14 U49.19 | length 107.1
  F.Cu w0.08: v3(-34.81,35.27) -33.54,35.27 -32.56,36.25 -32.15,36.25 -31.95,36.05 -30.18,36.05 v3(-29.31,36.92) ; v3(-26.84,37.67) -26.03,38.48 -24.45,38.48 -23.61,37.64 -21.72,37.64 -21.51,37.43 -21.51,35.7 -21.26,35.45 v3(-19.03,35.45) ; v2(-1.39,29.65) -1.39,29.11 -1.48,29.02 -1.48,28.46 -1.15,28.13 v3(-1.15,25.67) ; v3(0.22,22.52) 0.62,22.12 v3(1.81,22.12) ; U10.14@0.7,14.67 0.7,16.08 v3(0.78,16.16)
  In1.Cu w0.08: v2(-39.33,35.86) -38.74,35.27 v3(-34.81,35.27) ; v3(-29.31,36.92) -27.95,36.92 -27.7,37.17 -27.7,37.44 -27.47,37.67 v3(-26.84,37.67) ; v3(-19.03,35.45) -15.54,35.45 -14.92,36.07 v3(-14.92,36.94) ; v3(-3.95,35.09) -3.95,32.58 -3.87,32.5 -3.87,28.06 -1.48,25.67 v3(-1.15,25.67) -0.86,25.67 -0.67,25.48 -0.67,22.86 -0.33,22.52 v3(0.22,22.52) ; v3(0.78,16.16) 0.78,16.61 0.86,16.69 0.86,18.34 1.81,19.29 v3(1.81,22.12)
  In5.Cu w0.08: v2(-39.33,35.86) -39.33,34.78 -40.09,34.02 -40.1,34.02 -40.1,33.47 -39.27,32.64 -39.27,31.96 -37.64,30.33 -24.52,30.33 -23.91,30.94 -2.67,30.94 -1.39,29.66 v2(-1.39,29.65)
  In8.Cu w0.08: v2(-1.39,29.65) -1.4,29.64 -1.4,31.92 -0.7,32.62 v1(-0.06,32.62)
  B.Cu w0.08: v1(-0.06,32.62) -0.06,33.255 U49.19@0.005,33.32
Net-(U10-D4): R65.2 U4.29 U10.15 U49.18 | length 71.7
  F.Cu w0.08: v3(-14.09,44.9) -14.09,47.1 -13.2,47.99 v3(-7.07,47.99) ; v3(-12.94,44.92) -12.27,44.92 -12.05,44.7 -12.05,41.46 -12.91,40.6 v3(-12.93,40.6) ; v3(-3.3,33.79) v3(-3.3,35.09) ; v3(0.57,17.05) 1.13,17.05 2,16.18 U10.15@2,14.67
  F.Cu w0.2: R65.2@-13.89,36.94 -13.73,37.1 v3(-13.29,37.1)
  In1.Cu w0.08: v3(-14.09,44.9) -14.07,44.92 v3(-12.94,44.92) ; v3(-13.29,37.1) -13.29,40.24 v3(-12.93,40.6) ; v3(-7.07,47.99) -6.68,47.99 -6.09,47.4 -6.09,42.46 -4.46,40.83 -1.44,40.83 v2(-0.87,40.26) -1.59,39.54 -2.71,39.54 -3.27,38.98 -3.27,35.12 v3(-3.3,35.09) ; v3(-3.3,33.79) -3.3,32.55 -3.61,32.24 -3.61,28.17 -1.65,26.21 -0.9,26.21 -0.19,25.5 -0.19,23.04 -0.05,22.9 0.34,22.9 0.84,22.4 0.84,18.73 0.57,18.46 v3(0.57,17.05)
  In8.Cu w0.08: v2(-0.87,40.26) -2.04,39.09 -2.04,36.38 -1.32,35.66 -1.32,34.89 v1(-0.64,34.21)
  B.Cu w0.08: U49.18@-0.645,33.32 -0.64,33.325 v1(-0.64,34.21)
Net-(U10-D5): R55.1 U4.30 U10.16 U49.17 | length 87.8
  F.Cu w0.08: v3(-14.01,38.69) -11.07,38.69 -10.2,37.82 v3(-10.2,37.6) ; v3(-9.55,45.7) -9.53,45.68 -3.77,45.68 v2(-3.34,45.25) ; v3(-2.65,35.09) -2.65,33.6 -2.49,33.44 -2.32,33.44 -2.02,33.14 -2.02,32.44 -2.31,32.15 -2.31,30.75 -1.87,30.31 v3(0.75,30.31)
  F.Cu w0.3: U10.16@3.25,14.67 3.25,16.04 v3(3.38,16.17)
  In1.Cu w0.08: v3(-19.63,33.64) -19.63,35.77 -17.59,37.81 -14.48,37.81 -14.01,38.28 v3(-14.01,38.69) ; v3(-10.2,37.6) -10.2,39.2 -9.55,39.85 v3(-9.55,45.7) ; v2(-3.34,45.25) -3.34,43.68 -2.59,42.93 -1.39,42.93 -0.31,41.85 -0.31,39.35 -0.48,39.18 -0.48,38.91 -0.83,38.56 -1.86,38.56 -2.65,37.77 v3(-2.65,35.09) ; v3(0.75,30.31) 0.75,28.35 2.4,26.7 2.4,23.47 3.04,22.83 3.04,17.38 3.14,17.28 3.14,16.74 3.38,16.5 v3(3.38,16.17)
  In8.Cu w0.08: v1(-3.31,44.56) -2.99,44.24 -2.51,44.24 -0.61,42.34 1.99,42.34 2.77,41.56 v1(3.11,41.56) ; v1(3.39,37.69) 3.38,37.7 3.38,39.83 v1(3.4,39.85)
  B.Cu w0.08: v2(-3.34,45.25) -3.34,44.59 v1(-3.31,44.56) ; U49.17@-1.295,33.32 -1.295,34.385 -0.96,34.72 0.73,34.72 0.81,34.8 2.85,34.8 3.1,35.05 3.1,37.4 v1(3.39,37.69) ; v1(3.11,41.56) 3.11,40.66 3.4,40.37 v1(3.4,39.85)
Net-(U10-D6): R48.1 U4.31 U10.17 U49.16 | length 104
  F.Cu w0.08: R48.1@-18.5,33.64 -18.5,32.39 -17.61,31.5 v3(-14.83,31.5) ; v3(-12.11,34.72) v3(-9.16,34.72) ; v3(-6.81,46.39) -5.23,46.39 v3(-5.22,46.4) ; v3(0.08,27.32) 3.54,27.32 v3(3.57,27.29)
  F.Cu w0.3: v3(-2.05,35.09) -2.05,33.78 v3(-1.87,33.6) ; v3(4.38,16.36) 4.5,16.24 U10.17@4.5,14.67
  In1.Cu w0.08: v3(-14.83,31.5) -13.67,31.5 -12.11,33.06 v3(-12.11,34.72) ; v3(-9.16,34.72) -9.16,41.79 -8.08,42.87 -8.08,45.07 -7.6,45.55 -7.3,45.55 -6.81,46.04 v3(-6.81,46.39) ; v3(-5.22,46.4) -3.68,46.4 -2.76,45.48 v2(-2.76,44.79) -2.76,44.03 -2.06,43.33 1.29,43.33 2.93,41.69 2.93,37.63 2.14,36.84 -0.3,36.84 v3(-2.05,35.09) ; v3(-1.87,33.6) -2.86,32.61 -2.86,32.23 -3.25,31.84 -3.25,28.53 -2.04,27.32 v3(0.08,27.32) ; v3(3.57,27.29) 3.57,23.27 3.42,23.12 3.42,18.3 3.73,17.99 3.73,17.45 4.38,16.8 v3(4.38,16.36)
  In6.Cu w0.08: v2(-5.45,31.94) -4.93,31.94 -4.51,32.36 -4.51,39.65 -3.7,40.46 -3.38,40.46 -3.38,40.48 -2.76,41.1 v2(-2.76,44.79)
  In8.Cu w0.08: v1(-4.77,33.02) -4.77,35.19 v1(-4.53,35.43)
  B.Cu w0.08: v2(-5.45,31.94) -4.97,31.94 -4.78,32.13 -4.78,33.01 v1(-4.77,33.02) ; v1(-4.53,35.43) -4.53,37.48 -4.29,37.72 -2.09,37.72 -1.945,37.575 U49.16@-1.945,33.32
Net-(U10-D7): R56.1 U4.32 U10.18 U49.15 | length 139.3
  F.Cu w0.08: v3(-14.2,35.32) -13.18,35.32 v3(-13.16,35.3) ; v3(-12.19,47.69) -7.63,47.69 -7.46,47.52 -7.46,46.03 -7.29,45.86 -1.7,45.86 -1.22,45.38 v2(-1.22,44.8) ; v3(1.29,23.81) 2.08,23.81 3.01,22.88 v3(3.96,22.88)
  F.Cu w0.3: v3(5.43,16.49) 5.8,16.12 U10.18@5.8,14.67
  In1.Cu w0.08: v3(-17.32,33.64) -16.68,34.28 -15.24,34.28 v3(-14.2,35.32) ; v3(-13.16,35.3) -12.41,36.05 -12.41,38.42 -11.19,39.64 -11.19,43.54 -12.19,44.54 v3(-12.19,47.69) ; v2(-1.22,44.8) -1.22,44.36 -0.76,43.9 1.5,43.9 3.1,42.3 3.1,37.39 2.31,36.6 1.06,36.6 0.03,35.57 -0.87,35.57 v3(-1.35,35.09) -1.35,34.71 -3.1,32.96 -3.1,32.34 -3.42,32.02 -3.42,28.39 -2.07,27.04 -1.39,27.04 0.1,25.55 0.1,24.96 1.25,23.81 v3(1.29,23.81) ; v3(3.96,22.88) 3.96,20.59 4.08,20.47 4.08,19.49 3.66,19.07 3.66,18.46 3.93,18.19 3.93,17.99 v3(5.43,16.49)
  In6.Cu w0.08: v2(-1.22,44.8) -1.22,49.555 3.03,53.805 v2(3.03,56.78)
  In8.Cu w0.08: v1(-2.595,33.32) -2.355,33.08 0.33,33.08 1.65,31.76 v1(2.43,31.76) ; v2(3.03,56.78) 3.03,55.62 3.85,54.8 v1(9.33,54.8) ; v1(3.74,32.54) 3.89,32.39 5.02,32.39 5.26,32.63 6.8,32.63 v1(8.23,31.2) ; v1(10.09,31.21) 10.09,32.12 9.69,32.52 9.69,37.93 11.04,39.28 v1(12.51,39.28)
  B.Cu w0.08: v1(2.43,31.76) 2.44,31.77 3.06,31.77 3.74,32.45 v1(3.74,32.54) ; v1(8.23,31.2) 10.08,31.2 v1(10.09,31.21) ; v1(9.33,54.8) 9.33,54.42 9.45,54.3 9.45,50.04 9.57,49.92 9.57,48.84 9.8,48.61 12.44,48.61 12.51,48.54 v1(12.51,39.28)
Net-(U10-M): R92.2 U10.24 | length 54.8
  F.Cu w0.3: U10.24@13.45,14.67 13.45,16.2 v2(13.55,16.3)
  F.Cu w0.4: R92.2@-19.57,-5.94 -19.57,-5.23 v2(-19.52,-5.18)
  In3.Cu w0.08: v2(-19.52,-5.18) -19.43,-5.09 -8.38,-5.09 -6.75,-3.46 10.3,-3.46 10.35,-3.51 v2(10.48,-3.51)
  In6.Cu w0.08: v2(10.48,-3.51) 10.48,-1.33 10.07,-0.92 10.07,0.37 10.45,0.75 10.45,2.07 11.35,2.97 11.35,3.82 11.09,4.08 11.09,6.38 13.56,8.85 13.56,16.29 v2(13.55,16.3)
Net-(U10-MO): U10.21 U46.7 | length 56.4
  F.Cu w0.08: v3(3.39,17.81) 3.96,17.24 5.98,17.24 6.57,16.65 9.1,16.65 9.6,16.15 U10.21@9.6,14.67 ; v3(3.9,36.91) 4.25,36.56 v3(4.25,35.94)
  In1.Cu w0.08: v3(3.39,17.81) 3.21,17.99 3.21,23.29 3.35,23.43 3.35,26.62 3.22,26.75 3.22,27.5 3.64,27.92 3.64,30.66 1.53,32.77 1.53,35.6 1.87,35.94 v3(4.25,35.94) ; v3(3.9,36.91) 3.88,36.93 3.88,38.22 4.33,38.67 4.33,44.8 6.04,46.51 6.6,46.51 7.14,47.05 v2(7.14,47.78)
  In8.Cu w0.08: v1(2.69,40.92) 4.45,40.92 v1(4.46,40.93) ; v1(5.14,43.79) 5.14,45.32 6.12,46.3 6.12,47.29 6.61,47.78 v2(7.14,47.78)
  B.Cu w0.08: U46.7@2.46,43.27 2.46,41.66 2.69,41.43 v1(2.69,40.92) ; v1(4.46,40.93) 4.46,43.11 v1(5.14,43.79)
Net-(U10-RD#): R243.2 U10.6 U34.6 | length 317.4
  F.Cu w0.08: v2(-35.62,-30.57) -35.62,-26.01 -35.1,-25.49 -28.8,-25.49 -28.38,-25.07 v3(-27.78,-25.07) ; v3@-28.17,-23.31 v3(-28.16,-23.32) ; v3(-26.63,-24.3) -26.31,-24.62 -25.8,-24.62 -25.67,-24.75 -23.94,-24.75 -21.84,-26.85 -17.79,-26.85 -17.07,-26.13 v3(-16.78,-26.13) ; v3(-13.35,4) -13.14,4.21 -7.05,4.21 -6.33,3.49 -4.53,3.49 v3(-4.44,3.58) ; v3(4.78,23) 5.25,23.47 5.83,23.47 5.99,23.31 6.74,23.31 7.05,23.62 U10.6@7.05,25.47
  F.Cu w0.3: v3@-28.17,-23.31 U34.6@-28.17,-22.36
  In1.Cu w0.08: v3(-27.78,-25.07) -27.78,-24.09 -28.16,-23.71 v3(-28.16,-23.32) -27.68,-23.32 -26.7,-24.3 v3(-26.63,-24.3) ; v3(-16.78,-26.13) -16.78,-24.03 -18.08,-22.73 -18.74,-22.73 -18.87,-22.6 -18.87,-21.91 -18.61,-21.65 -17.12,-21.65 -16.41,-20.94 -16.41,-20.11 -16.66,-19.86 -16.96,-19.86 -17.17,-19.65 -17.17,-19.25 -16.97,-19.05 -16.6,-19.05 -16.41,-18.86 -16.41,-17.89 -16.17,-17.65 -16.17,-16.57 -16.22,-16.52 -16.22,-15.73 -16.34,-15.61 -16.34,-14.97 -16.02,-14.65 -16.02,-9.15 -15.33,-8.46 -15.33,3.49 -15.07,3.75 -13.6,3.75 v3(-13.35,4) ; v3(-4.44,3.58) -4.44,4.27 -4.16,4.55 -4.16,4.59 -4.06,4.69 -4.06,5.97 -3.51,6.52 -3.51,10.85 -3.78,11.12 -3.78,13.98 -2.87,14.89 -0.67,14.89 -0.49,15.07 5.55,15.07 5.95,15.47 5.95,17.02 5.41,17.56 5.41,18.32 4.78,18.95 v3(4.78,23)
  In3.Cu w0.08: v2(-54.15,23.08) -53.87,23.08 -53.45,22.66 -53.45,18.57 -52.72,17.84 -52.72,14.26 -53.3,13.68 -53.99,13.68 v2(-54,13.67) ; v2(-45.17,-30.51) -45.15,-30.49 -35.93,-30.49 -35.85,-30.57 v2(-35.62,-30.57)
  In4.Cu w0.08: v2(-54,13.67) -52.99,13.67 -52.385,13.065 -52.385,-5.755 -52,-6.14 -52,-13.11 -52.85,-13.96 -52.85,-27.18 -51.48,-28.55 -47.13,-28.55 v2(-45.17,-30.51)
  In5.Cu w0.08: v2(-54.15,23.08) -53.51,23.72 -53.51,30.15 -53.775,30.415 -53.775,31.8 -53.105,32.47 -53.03,32.47 -52.66,32.84 -51.18,32.84 -49.5,34.52 -49.5,47.99 -44.51,52.98 -44.51,57.41 -42.85,59.07 -36.3,59.07 -35.58,58.35 -35.58,57.39 -35.37,57.18 -35.37,56.62 -35.34,56.59 -35.3,56.59 -34.63,55.92 -34.35,55.92 -30.31,51.88 -17.2,51.88 -15,54.08 -15,57.77 -14.13,58.64 -12.66,58.64 -12.06,59.24 2.64,59.24 5.33,56.55 v2(5.33,56.54)
  In8.Cu w0.08: v1(1.32,48.29) 1.75,48.29 4.87,51.41 v1(4.87,54.37) ; v1(1.34,47.07) v1(4.54,47.07) ; v1(4.54,45.25) 4.54,43.66 5.46,42.74 v1(5.78,42.74) ; v1(7.88,41.52) 7.91,41.49 7.91,35.85 v1(8.81,34.95) ; v1(10.02,34.3) 10.02,32.5 12.49,30.03 v1(12.77,30.03)
  B.Cu w0.08: v1(1.32,48.29) 1.34,48.27 v1(1.34,47.07) ; v1(4.54,45.25) v1(4.54,47.07) ; v1(4.87,54.37) 5.33,54.83 v2(5.33,56.54) ; v1(5.78,42.74) 5.78,42.51 6.38,41.91 7.49,41.91 v1(7.88,41.52) ; v1(8.81,34.95) 9.46,34.3 v1(10.02,34.3)
Net-(U10-SH): U10.20 U46.4 | length 47.8
  F.Cu w0.08: v3(-1.41,18.87) -1.1,18.56 3.27,18.56 4.38,17.45 6.07,17.45 6.65,16.87 7.67,16.87 8.37,17.57 v3(9.15,17.57)
  In1.Cu w0.08: v2(-5.34,28.94) -5.85,28.43 -5.85,27.87 -4.79,26.81 -4.12,26.81 -3.88,26.57 -3.88,25.52 -3.19,24.83 -3.19,21.4 -3.65,20.94 -3.65,19.74 -3.22,19.31 -3.22,19.29 -2.8,18.87 v3(-1.41,18.87) ; v3(8.35,14.67) 8.35,15.13 9.15,15.93 v3(9.15,17.57)
  In6.Cu w0.08: v2(-5.34,28.94) -4.3,29.98 -4.3,38.38 -3.06,39.62 -2.76,39.62 -2.49,39.89 -2.49,41.93 -2.11,42.31 v2(-2.11,44.8)
  B.Cu w0.3: v2(-2.11,44.8) -1.375,44.065 U46.4@-1.375,43.27
Net-(U10-SY): U10.23 U46.10 | length 37.3
  F.Cu w0.3: U10.23@12.15,14.67 12.15,16.2 v2(12.26,16.31)
  In3.Cu w0.08: v2(2.96,23.71) 2.96,21.92 3.47,21.41 9.7,21.41 12.26,18.85 v2(12.26,16.31)
  In6.Cu w0.08: v2(2.53,38.88) 0.88,38.88 0.4,38.4 0.4,26.35 2.96,23.79 v2(2.96,23.71)
  In8.Cu w0.08: v1(2.43,37.68) 2.43,38.26 2.53,38.36 v2(2.53,38.88)
  B.Cu w0.08: U46.10@2.435,36.32 2.435,37.675 v1(2.43,37.68) v1@2.475,37.635
Net-(U10-WR#): R245.2 U10.5 U34.8 | length 103.7
  F.Cu w0.08: U34.8@-28.82,-28.085 -28.82,-27.26 -28.67,-27.11 -27.79,-27.11 -27.21,-26.53 -25.26,-26.53 -24.76,-27.03 v3(-24.28,-27.03) ; v3(-23.6,-23.1) -20.61,-23.1 -20.3,-22.79 -20.3,-20.61 -20.52,-20.39 v3(-20.52,-19.26) ; v3(-18.88,-15.7) -18.36,-15.7 -18.1,-15.96 -17.18,-15.96 v3(-17.01,-15.79) ; v3(-14.86,4.62) -14.74,4.74 -13.79,4.74 -13.74,4.79 -5.41,4.79 -5.01,4.39 v3(-3.89,4.39) ; v2(5.31,22.88) 5.5,23.07 7.75,23.07 8.35,23.67 U10.5@8.35,25.47
  In1.Cu w0.08: v3(-24.28,-27.03) -24.02,-26.77 -24.02,-26.03 -23.6,-25.61 v3(-23.6,-23.1) ; v3(-20.52,-19.26) -20.35,-19.09 -20.35,-16.62 -19.43,-15.7 v3(-18.88,-15.7) ; v3(-17.01,-15.79) -17.01,-14.68 -16.62,-14.29 -16.62,-8.73 -15.92,-8.03 -15.92,4.04 -15.34,4.62 v3(-14.86,4.62) ; v3(-3.89,4.39) -3.88,4.4 -3.88,5.83 -3.31,6.4 -3.31,11.04 -3.59,11.32 -3.59,13.7 -3.4,13.89 -1.35,13.89 -0.36,14.88 5.8,14.88 6.14,15.22 6.14,17.15 5.6,17.69 5.6,19.88 5.11,20.37 5.11,22.68 v2(5.31,22.88)
  In8.Cu w0.08: v2(5.31,22.88) 5.72,22.88 5.9,23.06 7.07,23.06 7.78,22.35 7.78,22.13 7.88,22.03 8.66,22.03 9.07,22.44 v1(9.07,25.27) ; v1(11.01,25.29) 12.77,27.05 v1(12.77,29.05)
  B.Cu w0.08: v1(9.07,25.27) 9.09,25.29 v1(11.01,25.29)
Net-(U11A-+): C214.1 R75.1 U11.3 | length 48.8
  F.Cu w0.08: v3(1.2,33.63) 1.51,33.32 7.47,33.32 8.06,33.91 R75.1@8.06,34.6 7.64,34.6 7.28,34.96 7.28,36.49 v3(7.64,36.85) ; v2(2.52,44.99) 2.52,45.45 2.81,45.74 6.75,45.74 6.91,45.58 6.91,40.69 7.19,40.41 7.51,40.41 7.66,40.26 7.66,38.15 v3(7.61,38.1)
  In1.Cu w0.08: v3(1.2,33.63) 1.2,32.72 2.44,31.48 v3(2.44,31.04) ; v3(7.61,38.1) 7.61,36.88 v3(7.64,36.85)
  In8.Cu w0.08: v2(2.52,44.99) 2.51,44.98 2.51,44.16 4.55,42.12 9.57,42.12 v1(9.88,42.43)
  B.Cu w0.08: C214.1@7.31,32.405 7.31,34.32 8.58,35.59 9,35.59 9.34,35.93 9.34,38.58 9.88,39.12 v1(9.88,42.43)
Net-(U11A--): R67.2 U11.2 U46.16 | length 15
  F.Cu w0.08: U11.2@2.44,30.39 3.2,30.39 3.62,30.81 R67.2@3.96,30.81
  F.Cu w0.3: v2(1.16,30.91) 1.68,30.39 U11.2@2.44,30.39
  In8.Cu w0.08: v1(-5.19,36.32) -5.02,36.32 -4.24,35.54 -4.24,35.27 -4.57,34.94 -4.57,33.83 -4.49,33.75 -4.49,32.86 -4.63,32.72 v1(-4.63,31.16)
  B.Cu w0.08: v1(-4.63,31.16) -4.45,30.98 0.94,30.98 1.01,30.91 v2(1.16,30.91)
Net-(U11B-+): C44.2 R69.2 U11.5 | length 8.5
  F.Cu w0.08: v3(-4.59,28.81) -2.89,28.81 -2.62,28.54 C44.2@-2.62,28.06 ; U11.5@-3.46,31.69 -2.8,31.69 -2.61,31.88 R69.2@-2.61,32.91
  F.Cu w0.3: v3(-4.53,31.7) -4.52,31.69 U11.5@-3.46,31.69
  In1.Cu w0.08: v3(-4.59,28.81) -4.53,28.87 v3(-4.53,31.7)
Net-(U11B--): R72.2 U11.6 | length 1.6
  F.Cu w0.08: U11.6@-3.49,31.07 U11.6@-3.46,31.04
  F.Cu w0.3: R72.2@-5,31.07 -4.97,31.04 -3.52,31.04 U11.6@-3.49,31.07
Net-(U11C-V+): C157.1 C209.1 R256.1 U11.8 U46.1 | length 81.3
  F.Cu w0.08: v3(-8.3,36.39) -5.93,36.39 v3(-5.82,36.5) ; v3(-5.8,31.15) -5.8,29.58 -5.62,29.4 -4.65,29.4 -4.31,29.74 U11.8@-3.46,29.74
  In1.Cu w0.08: v2(-10,44.19) -10.48,43.71 -10.48,42.95 -9.94,42.41 -9.94,41.59 -10.51,41.02 -10.51,37.44 -9.91,36.84 -9.91,33.87 -9.06,33.02 -8.48,33.02 -8.3,33.2 v3(-8.3,36.39) ; v3(-5.82,36.5) -5.82,36.06 -5.89,35.99 -5.89,31.55 -5.8,31.46 v3(-5.8,31.15)
  In8.Cu w0.08: v1(-8.47,45.42) -8.16,45.11 v1(-5.95,45.11) -5.95,45.56 -5.41,46.1 -1.72,46.1 -0.8,45.18 -0.8,44.84 -0.38,44.42 1.23,44.42 3.54,46.73 4.88,46.73 v1(5.78,47.63) ; v1(5.78,49.64) v1(8.49,49.64) ; v1(10.31,37.603) 10.46,37.453 10.46,33.53 10.77,33.22 11.21,33.22 11.45,33.46 12.345,33.46 v1(13.115,32.69)
  B.Cu w0.08: v2(-10,44.19) -9.37,44.82 -9.07,44.82 v1(-8.47,45.42) ; C157.1@-6.93,43.37 -5.95,43.37 ; v1(-5.95,45.11) -5.95,43.39 -5.95,41.71 -5.72,41.48 -5.42,41.48 -5.19,41.71 U46.1@-5.19,43.27 ; v1(5.78,47.63) v1(5.78,49.64) ; v1(8.49,49.64) 8.49,47.57 7.91,46.99 7.91,45.27 9.68,43.5 10.57,43.5 11.19,42.88 11.19,38.483 v1(10.31,37.603)
Net-(U11C-V-): C157.2 C209.2 R250.2 U11.4 U46.12 | length 36.7
  F.Cu w0.3: U11.4@2.44,31.69 3.89,31.69 v2(4.08,31.88)
  In3.Cu w0.5: v2(-9.05,43.04) -7.84,43.04 -6.67,41.87 -6.67,39.4 -6.24,38.97 -4.23,38.97 -2.45,37.19 -1.34,37.19 -0.75,37.78 v2(-0.75,38.02) -0.67,38.02 1.15,36.2 1.15,34.85 4.08,31.92 v2(4.08,31.88) 6.87,31.88 v2(8.69,33.7)
  B.Cu w0.3: v2(4.08,31.88) v2@4.1,31.86
  B.Cu w0.5: v2(-9.05,43.04) -8.72,43.37 C157.2@-7.89,43.37 ; v2(-0.75,38.02) -0.74,38.02 -0.105,37.385 U46.12@-0.105,36.32 ; v2@4.1,31.86 4.1,29.77 5.042,28.827 R250.2@5.23,28.827 ; v2(8.69,33.7) 9.7,32.69 C209.2@10.165,32.69
Net-(U12-Bypass): C54.1 U12.2 U12.3 | length 5.6
  F.Cu w0.4: C54.1@16.34,12.65 17.27,12.65 ; U12.3@19.19,12.41 17.51,12.41 17.27,12.65 ; U12.2@19.19,13.66 17.7,13.66 17.27,13.23 17.27,12.65
Net-(U12-{\S\D\}\)\: C248.2 D40.3 R247.1 U12.1 | length 29.7
  F.Cu w0.08: v2(18.8,5.55) 19.4,5.55 19.71,5.86 19.94,5.86 20.18,6.1 20.18,9.67 21.05,10.54 21.4,10.54 21.97,11.11 21.97,14.02 21.03,14.96 U12.1@19.24,14.96
  B.Cu w0.08: v2(18.8,5.55) 19.18,5.93 20.06,5.93 20.36,5.63 21.62,5.63 22.18,6.19 22.18,7.48 21.49,8.17 21.49,10.39 20.215,11.665 C248.2@19.42,11.665 D40.3@19.42,13.68 19.42,15.42 19.82,15.82 R247.1@20.59,15.82
Net-(U13-CD): C60.2 D8.3 U13.5 | length 3.4
  F.Cu w0.08: C60.2@-43.1,-9.055 C60.2@-43.065,-9.09
  F.Cu w0.4: C60.2@-43.1,-9.055 U13.5@-43.1,-7.488 -42.872,-7.26 -41.425,-7.26 D8.3@-41.42,-7.265
Net-(U13-OUT): R83.1 U13.1 U15.2 | length 18.3
  F.Cu w0.08: v3(-42.3,1.8) -42.27,1.83 v3(-40.73,1.83)
  F.Cu w0.3: R83.1@-40.17,-1.59 -40.17,-1.94 v3(-39.71,-2.4) -38.5,-2.4 -38.3,-2.2 U15.2@-38.3,-1.23
  F.Cu w0.4: U13.1@-43.1,-5.212 -42.363,-5.212 v2(-42.31,-5.16)
  In1.Cu w0.08: v2(-42.31,-5.16) -42.96,-4.51 -42.96,-4.02 -42.3,-3.36 v3(-42.3,1.8) ; v3(-40.73,1.83) -40.26,1.83 -39.71,1.28 v3(-39.71,-2.4)
Net-(U13-VDD): C55.2 D8.1 D11.1 R84.1 U13.2 | length 11.1
  F.Cu w0.3: R84.1@-42.01,-3.65 -42.02,-3.66 C55.2@-44.03,-3.66 -44.05,-3.68 U13.2@-44.05,-5.212 -44.05,-6.08 -43.81,-6.32 -40.49,-6.32 -40.095,-6.715 D8.1@-40.095,-7.265
  F.Cu w0.4: D11.1@-42.685,-2.055 -42.01,-2.73 R84.1@-42.01,-3.65
Net-(U16-CD): C59.1 D9.3 U16.5 | length 3.5
  F.Cu w0.5: C59.1@-51.53,2.255 -50.805,2.255 -50.46,1.91 U16.5@-49.828,1.91 -49.84,1.897 -49.84,0.875 D9.3@-49.385,0.42
Net-(U16-OUT): R91.1 U16.1 U63.9 | length 28.5
  F.Cu w0.08: R91.1@-44.91,3.11 R91.1@-44.89,3.13
  F.Cu w0.3: v3(-45.33,3.11) R91.1@-44.91,3.11
  F.Cu w0.4: U16.1@-47.552,1.91 -45.44,1.91 -44.89,2.46 R91.1@-44.89,3.13
  In1.Cu w0.08: v2(-46.7,-4.82) -46.7,2.24 -45.83,3.11 v3(-45.33,3.11)
  In3.Cu w0.08: v2(-46.7,-4.82) -46.69,-4.81 -46.09,-4.81 -45.18,-5.72 -40.5,-5.72 -39.99,-5.21 -39.37,-5.21 -38.05,-3.89 -38.05,-1.96 -36.81,-0.72 v2(-36.78,-0.72)
  B.Cu w0.08: U63.9@-37.16,1.31 -37.16,-0.34 v2(-36.78,-0.72)
Net-(U16-VDD): C56.1 D9.1 R79.2 U16.2 | length 10
  F.Cu w0.3: D9.1@-49.385,-0.905 -48.945,-0.905 -48.45,-0.41 -48.45,0.96 ; U16.2@-47.552,2.86 -48.37,2.86 -48.73,2.5 -48.73,1.42 -48.45,1.14 -48.45,0.96 ; R79.2@-45.57,0.94 -48.22,0.94 -48.24,0.96 -48.45,0.96
  F.Cu w0.4: U16.2@-47.552,2.86 -46.32,2.86 C56.1@-46.02,3.16
Net-(U17-CD): C57.2 D12.3 U17.5 | length 3.5
  F.Cu w0.08: C57.2@-50.395,-8.62 C57.2@-50.18,-8.405
  F.Cu w0.4: C57.2@-50.18,-8.405 U17.5@-50.18,-6.988 ; D12.3@-48.623,-6.987 D12.3@-48.53,-6.895
  F.Cu w0.5: U17.5@-50.18,-6.988 -50.083,-6.89 -48.72,-6.89 D12.3@-48.623,-6.987
Net-(U17-OUT): U17.1 U20.3 | length 52.2
  F.Cu w0.08: v2(-42.04,-8.71) -40.18,-8.71 v3(-40.11,-8.78) ; v3(-40.02,-5.55) -39.53,-5.55 -39.33,-5.75 -39.33,-7.27 -39.09,-7.51 -38.73,-7.51 -38.58,-7.66 -38.11,-7.66 -38.06,-7.71 -38.06,-7.75 -37.75,-8.06 v3(-36.61,-8.06) ; v3(-36.6,-3.12) -32.16,-3.12 v3(-32.09,-3.19) ; v3(-30.05,-6.24) v3(-27.83,-6.24) ; v3(-27.89,-9.99) -26.98,-9.99 -26.25,-10.72 -26.25,-12.45 -25.72,-12.98 U20.3@-24.82,-12.98
  In1.Cu w0.08: v2(-50.78,-10.42) -50.78,-9.89 -50.34,-9.45 -50.34,-4.872 v3(-50.18,-4.713) ; v3(-40.11,-8.78) -40.11,-8.36 -40.2,-8.27 -40.2,-5.73 v3(-40.02,-5.55) ; v3(-36.61,-8.06) -36.61,-3.13 v3(-36.6,-3.12) ; v3(-32.09,-3.19) -32.09,-5.7 -31.55,-6.24 v3(-30.05,-6.24) ; v3(-27.89,-9.99) -27.83,-9.93 v3(-27.83,-6.24)
  In3.Cu w0.08: v2(-50.78,-10.42) -50.78,-9.43 -50.06,-8.71 v2(-42.04,-8.71)
Net-(U18A-D): U18.2 U18.6 U18.11 | length 8.9
  F.Cu w0.08: v3(-20.27,-2.23) -20.09,-2.23 U18.11@-20.05,-2.19
  In1.Cu w0.08: v3(-25.775,-0.89) v3(-25.775,-3.49) -25.43,-3.49 -25.34,-3.58 -24.34,-3.58 -22.99,-2.23 v3(-20.27,-2.23)
Net-(U18B-D): R92.1 U18.8 U18.12 | length 6.6
  F.Cu w0.08: R92.1@-20.59,-5.94 -20.88,-5.94 -21.22,-5.6 -21.22,-4.55 -20.81,-4.14 U18.8@-20.05,-4.14 v3(-19.64,-4.14) ; U18.12@-20.05,-1.54 -20,-1.59 v3(-19.61,-1.59)
  In1.Cu w0.08: v3(-19.64,-4.14) -19.64,-1.62 v3(-19.61,-1.59)